# Altium PCB 2009_DFMUX_MEZZANINE_REV4_TIMEMAIL.PCBDOC (part 4 of 6)
Units mil, origin at the board's own origin, x right, y up, seen from the top; angles counter-clockwise.
Board outline 4922.86 x 3627.76 mil, 6 copper layers (Top Layer, Internal Plane 1, Mid-Layer 1, Internal Plane 2, Mid-Layer 2, Bottom Layer); 519 components, 606 nets, 2175 pads, 757 vias.
Unrouted connection lines stored in the file: 148.
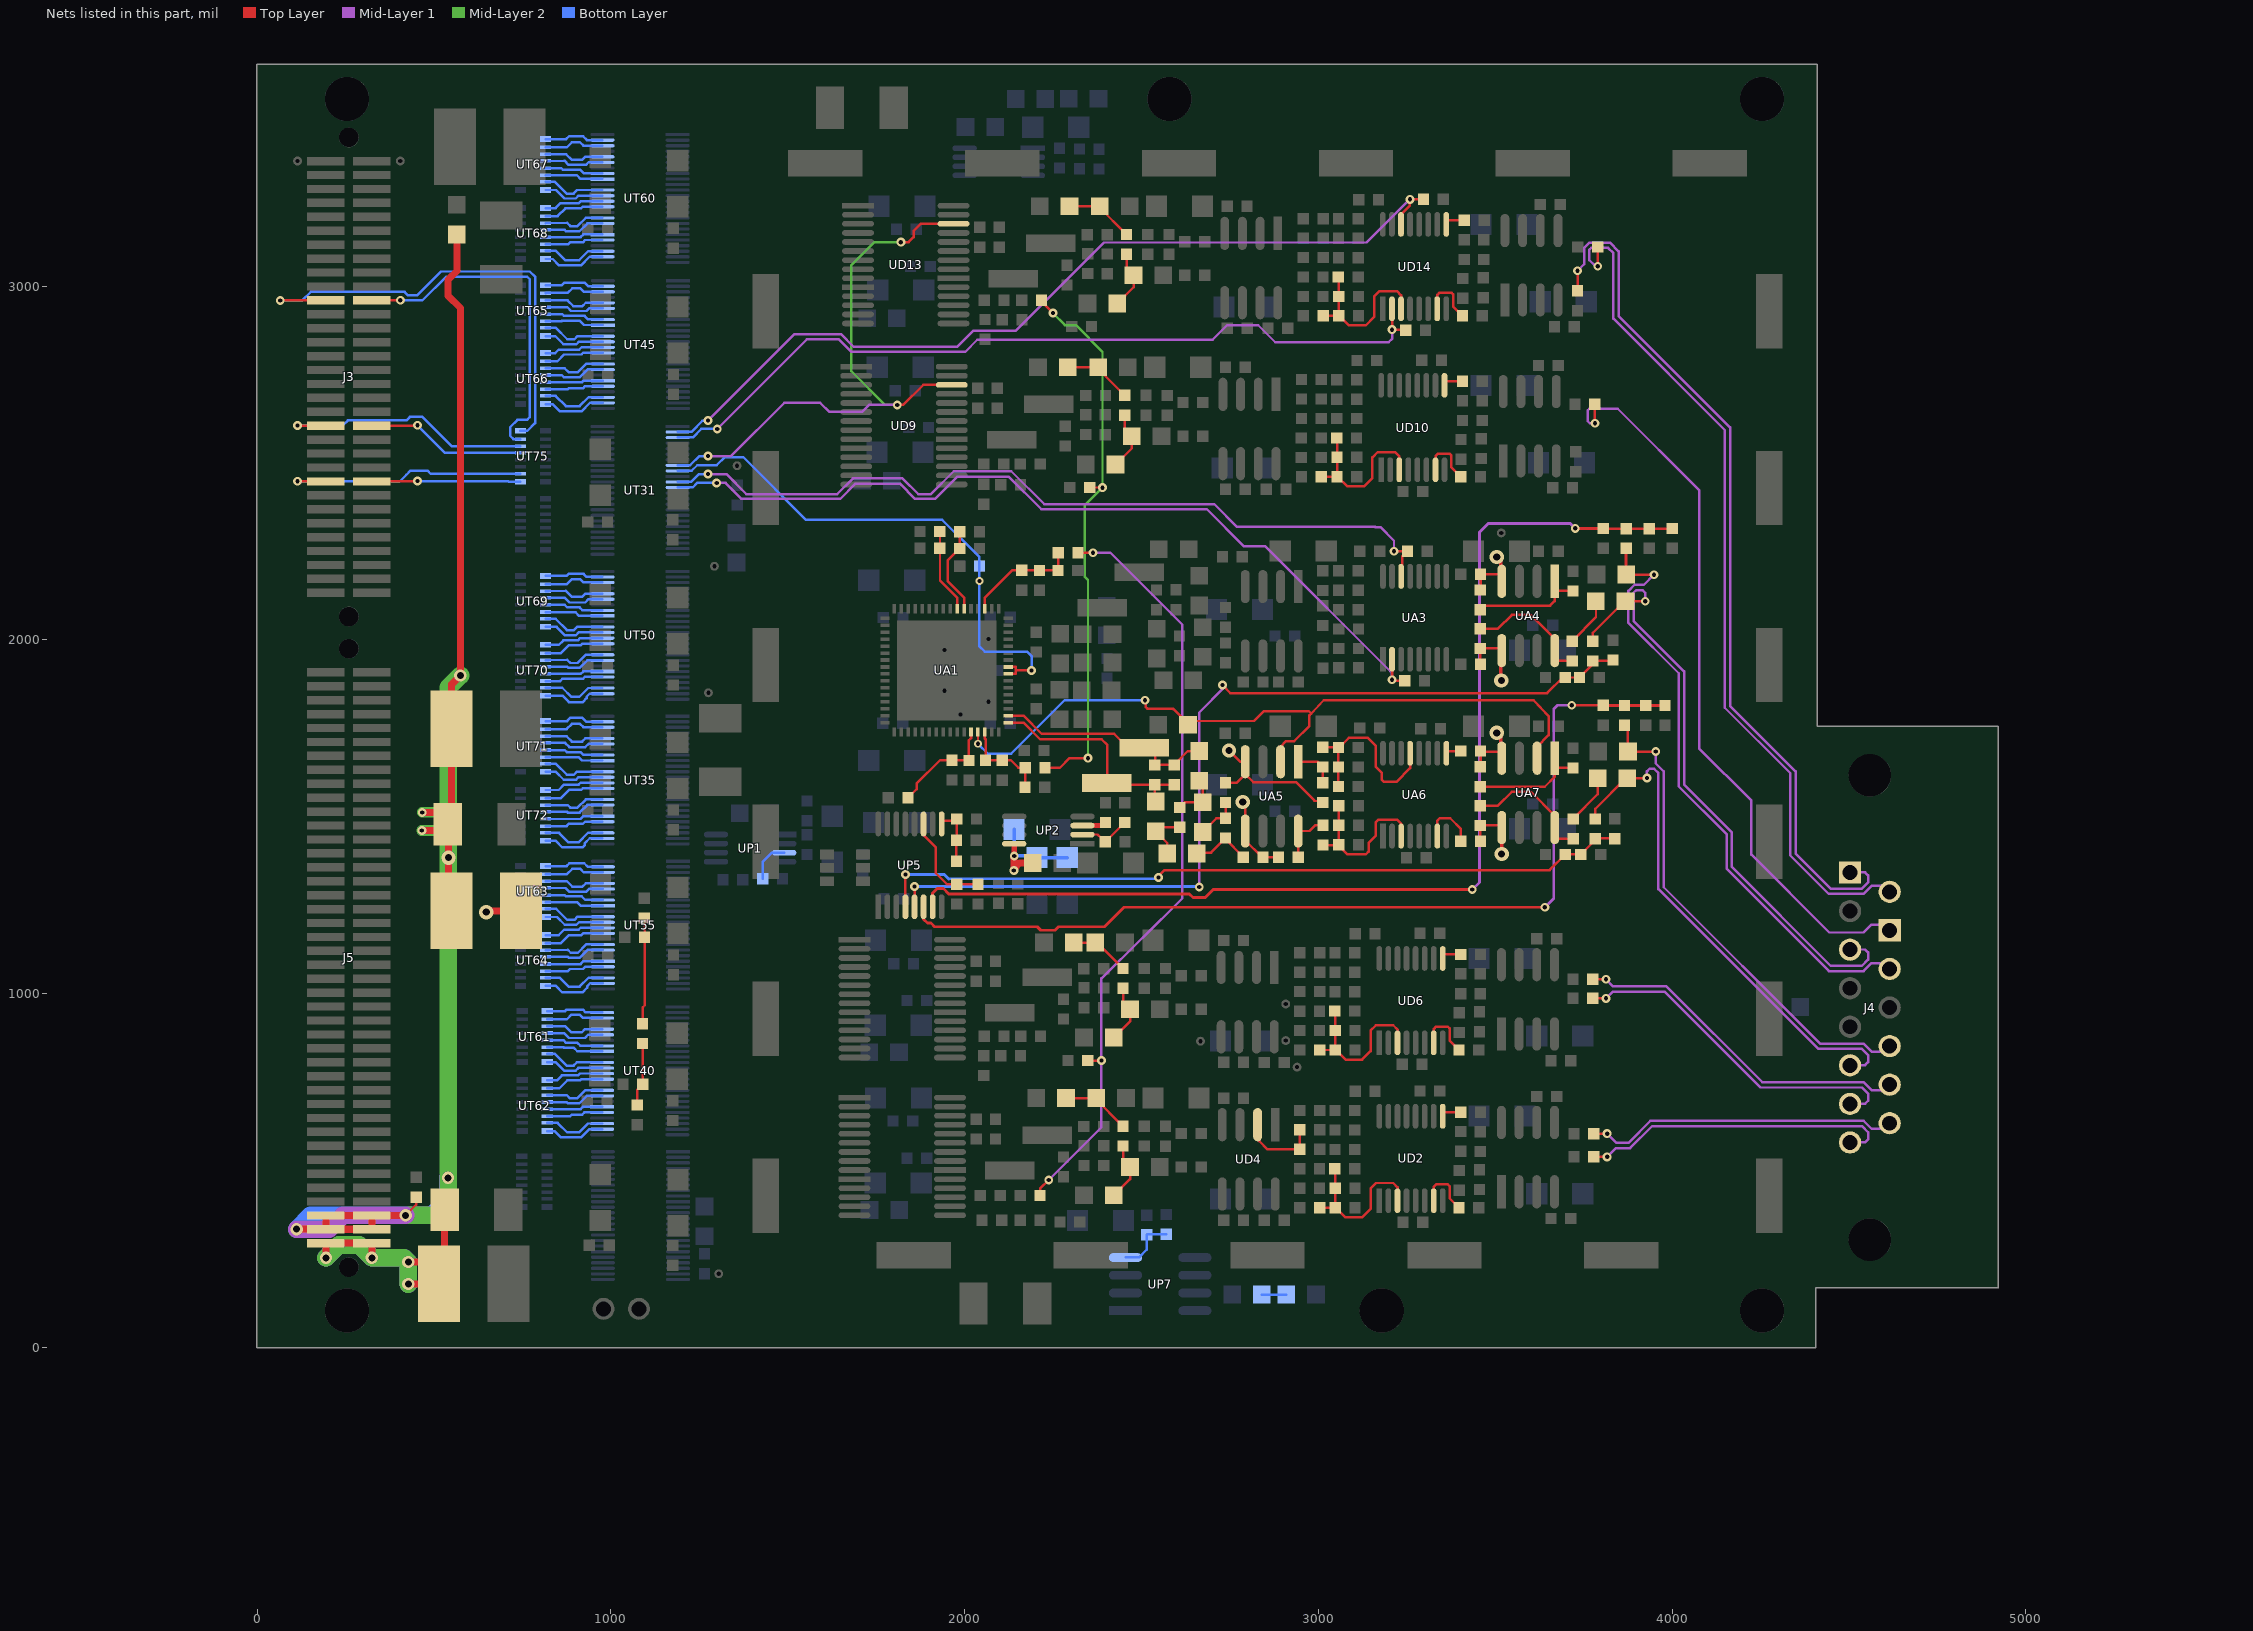
[diagram p8: the nets of this part, all layers, seen from the top]

## Via types
v1: diameter 25, hole 12, Top Layer to Bottom Layer, 692 vias
v2: diameter 40, hole 20, Top Layer to Bottom Layer, 39 vias
v3: diameter 35, hole 20, Top Layer to Bottom Layer, 23 vias
v4: diameter 22, hole 12, Top Layer to Bottom Layer, 3 vias

## Nets (pads, with @x,y where several pads share a name; then routed paths per layer and width w, separated by ;. In a path a pad name is that pad's centre, name@x,y a point inside that pad or via, vN(x,y) a via of type N, cw(c..) or ccw(c..) an arc to the next point about the centre after c; other vN are vias at no path point) (continued)
N197030_6344: RD4.1 RD12.1 UD4.2 | length 228.3
  Top Layer w7: UD4.2@2827.63,629.43 2832.63,624.43 2832.63,583 2856.2,559.43 2947.63,559.43 RD4.1@2947.63,614.43
N197797: RA5.2 RA6.2 UA1.23 | length 238.1
  Top Layer w7: RA6.2@1930.27,2305.87 1930.27,2258.37 1930.27,2167.37 1978.66,2118.97 UA1.23@1978.66,2087.85
N197910: CA2.1 RA7.2 RA8.2 RA9.1 UA1.19 | length 319.9
  Top Layer w7: UA1.19@2057.4,2087.85 2057.4,2119 2134.27,2195.87 2161.77,2195.87 2211.77,2195.87 2264.27,2195.87 RA7.2@2264.27,2245.87
N197956: RA3.2 RA4.2 UA1.22 | length 251.4
  Top Layer w7: RA4.2@1985.77,2305.87 1985.77,2258.37 1951.77,2224.37 1951.77,2165.87 1998.35,2119.29 UA1.22@1998.35,2087.85
N198124: CA31.1 RA43.2 RA44.1 RA49.2 UA1.62 | length 256
  Top Layer w7: UA1.62@2057.4,1739.43 2057.4,1720.23 2059.27,1718.37 2059.27,1659.37 2106.77,1659.37 2130.77,1659.37 2151.77,1638.37 2170.77,1638.37 RA44.1@2170.77,1583.37
N198251: CA33.2 RA54.1 RA56.2 UA1.60 | length 307.4
  Top Layer w7: RA56.2@1840.27,1553.37 1864.27,1577.37 1864.27,1593.37 1930.27,1659.37 1964.27,1659.37 2011.77,1659.37 2011.77,1715.87 2018.03,1722.13 UA1.60@2018.03,1739.43
N199059: CP4.1 UP1.3 | length 119.3
  Bottom Layer w7: CP4.1@1429.63,1324 1429.63,1373 1454.43,1397.8 UP1.3@1489.63,1397.8
N199942: CP18.1 RP25.1 RP27.1 RP29.2 UP5.5 | length 2623.4
  Top Layer w7: UP5.5@1858.33,1245.8 v1(1858.33,1302.33) ; v1(2728.63,1872) 2751.27,1849 3646.63,1849 3690.63,1893.37 3697.63,1893.37 3737.63,1893.37 3775.63,1931.37 3775.63,1940.37 3829.63,1940.37 CP18.1@3832.63,1943.37
  Mid-Layer 1 w7: v1(2663,1301) 2663,1794 2735,1866 v1(2728.63,1872)
  Bottom Layer w8: v1(1858.33,1302.33) 2661.67,1302.33 v1(2663,1301)
N199948: CP20.1 RP32.1 RP33.2 RP34.2 UP5.4 | length 2158.2
  Top Layer w7: UP5.4@1832.73,1245.8 v1(1832.73,1336.73) ; v1(2548,1328) 2544,1328 2565,1349 3653.27,1349 3697.63,1393.37 3741.63,1393.37 3782.63,1434.37 3782.63,1437.37 3783.63,1438.37 CP20.1@3837.63,1438.37
  Bottom Layer w7: 1955,1324 v1@2544,1324
  Bottom Layer w8: v1(1832.73,1336.73) 1942.27,1336.73 1955,1324 ; v1@2544,1324 v1(2548,1328)
N200349: CA35.2 UA1.61 UA5.2 UA7.2 | length 2139.8
  Top Layer w7: v4(2037.72,1705.87) UA1.61@2037.72,1739.43 ; v1(2510,1829) 2511.63,1829 2511.63,1810.37 2516.57,1805.43 2590,1805.43 2590,1804 2632.6,1761.4 2631.63,1760.43 2641.63,1770.43 2817.63,1770.43 2845.63,1798.43 2972.63,1798.43 2979.63,1791.43 ; UA5.2@2892.63,1655.43 2892.63,1697.43 2908.63,1713.43 2931.63,1713.43 2974.63,1756.43 2974.63,1786.43 2979.63,1791.43 ; UA7.2@3617.63,1665.43 3617.63,1697.43 3650.63,1730.43 3650.63,1784.43 3608.37,1829 3015,1829 2979.63,1791.43
  Mid-Layer 1 w7: v1(2510,1829) 2511.63,1829 v1@2511.63,1825.37
  Bottom Layer w7: v4(2037.72,1705.87) 2065.22,1678.37 2131.77,1678.37 2282.4,1829 v1(2510,1829)
N200703: CA29.2 JA2.2 LA7.1 RA41.1 UA1.1 | length 654.5
  Top Layer w7: UA1.1@2123.35,1766 2166.07,1766 2213.63,1718.43 2387.63,1718.43 2402.63,1703.43 2402.63,1595.43 2407.63,1590.43 RA41.1@2537.63,1590.43 ; LA7.1@2539.63,1542.43 2537.63,1544.43 RA41.1@2537.63,1590.43 ; CA29.2@2592.63,1589.43 2591.63,1590.43 RA41.1@2537.63,1590.43
N205033: CD13.2 LD3.2 LD4.1 | length 166.3
  Top Layer w7: LD3.2@2421.63,429.43 2467.63,475.43 2467.63,509.43 2447.63,529.43 CD13.2@2447.63,568.43
N205033_3007: CD73.2 LD15.2 LD16.1 | length 166.3
  Top Layer w7: LD15.2@2431.63,2950.43 2477.63,2996.43 2477.63,3030.43 2457.63,3050.43 CD73.2@2457.63,3089.43
N205033_5405: CD53.2 LD11.2 LD12.1 | length 166.3
  Top Layer w7: LD11.2@2426.63,2495.43 2472.63,2541.43 2472.63,2575.43 2452.63,2595.43 CD53.2@2452.63,2634.43
N205033_5853: CD33.2 LD7.2 LD8.1 | length 166.3
  Top Layer w7: LD7.2@2421.63,875.43 2467.63,921.43 2467.63,955.43 2447.63,975.43 CD33.2@2447.63,1014.43
N205049: CD13.1 LD1.2 LD2.1 | length 199.1
  Top Layer w7: LD1.2@2286.63,704.43 LD2.1@2367.63,704.43 ; LD2.1@2372.63,704.43 LD2.1@2367.63,704.43 ; CD13.1@2447.63,624.43 LD2.1@2367.63,704.43
N205049_2984: CD73.1 LD13.2 LD14.1 | length 199.1
  Top Layer w7: LD13.2@2296.63,3225.43 LD14.1@2377.63,3225.43 ; LD14.1@2382.63,3225.43 LD14.1@2377.63,3225.43 ; CD73.1@2457.63,3145.43 LD14.1@2377.63,3225.43
N205049_5379: CD53.1 LD9.2 LD10.1 | length 199.1
  Top Layer w7: LD9.2@2291.63,2770.43 LD10.1@2372.63,2770.43 ; LD10.1@2377.63,2770.43 LD10.1@2372.63,2770.43 ; CD53.1@2452.63,2690.43 LD10.1@2372.63,2770.43
N205049_5827: CD33.1 LD5.2 LD6.1 | length 169.8
  Top Layer w7: LD5.2@2308.63,1144 2369.63,1144 2374.63,1144 2447.63,1071 CD33.1@2447.63,1070.43
N205083: RD21.1 RD22.2 RD23.1 RD24.1 UD2.3 | length 458.8
  Top Layer w7: RD22.2@3003.63,394.43 RD23.1@3047.63,394.43 ; RD24.1@3046.63,504.43 3047.63,503.43 3047.63,449.43 RD23.1@3047.63,394.43 ; UD2.3@3223.83,414.43 3223.83,452.23 3211.63,464.43 3162.63,464.43 3147.63,449.43 3147.63,391.43 3123.63,367.43 3076.63,367.43 3049.63,394.43 RD23.1@3047.63,394.43
N205083_3003: RD111.1 RD112.2 RD113.1 RD114.1 UD14.3 | length 458.8
  Top Layer w7: RD112.2@3013.63,2915.43 RD113.1@3057.63,2915.43 ; RD114.1@3056.63,3025.43 3057.63,3024.43 3057.63,2970.43 RD113.1@3057.63,2915.43 ; UD14.3@3233.83,2935.43 3233.83,2973.23 3221.63,2985.43 3172.63,2985.43 3157.63,2970.43 3157.63,2912.43 3133.63,2888.43 3086.63,2888.43 3059.63,2915.43 RD113.1@3057.63,2915.43
N205083_5399: RD81.1 RD82.2 RD83.1 RD84.1 UD10.3 | length 458.8
  Top Layer w7: RD82.2@3008.63,2460.43 RD83.1@3052.63,2460.43 ; RD84.1@3051.63,2570.43 3052.63,2569.43 3052.63,2515.43 RD83.1@3052.63,2460.43 ; UD10.3@3228.83,2480.43 3228.83,2518.23 3216.63,2530.43 3167.63,2530.43 3152.63,2515.43 3152.63,2457.43 3128.63,2433.43 3081.63,2433.43 3054.63,2460.43 RD83.1@3052.63,2460.43
N205083_5847: RD51.1 RD52.2 RD53.1 RD54.1 UD6.3 | length 458.8
  Top Layer w7: RD52.2@3003.63,840.43 RD53.1@3047.63,840.43 ; RD54.1@3046.63,950.43 3047.63,949.43 3047.63,895.43 RD53.1@3047.63,840.43 ; UD6.3@3223.83,860.43 3223.83,898.23 3211.63,910.43 3162.63,910.43 3147.63,895.43 3147.63,837.43 3123.63,813.43 3076.63,813.43 3049.63,840.43 RD53.1@3047.63,840.43
N205093: RD3.1 UD2.9 | length 63.9
  Top Layer w7: UD2.9@3351.72,653.02 3351.72,654.43 3351.63,654.43 3351.63,665.43 3352.63,664.43 RD3.1@3402.63,664.43
N205093_2991: RD93.1 UD14.9 | length 63.9
  Top Layer w7: UD14.9@3361.72,3174.02 3361.72,3175.43 3361.63,3175.43 3361.63,3186.43 3362.63,3185.43 RD93.1@3412.63,3185.43
N205093_5387: RD63.1 UD10.9 | length 63.9
  Top Layer w7: UD10.9@3356.72,2719.02 3356.72,2720.43 3356.63,2720.43 3356.63,2731.43 3357.63,2730.43 RD63.1@3407.63,2730.43
N205093_5835: RD33.1 UD6.9 | length 63.9
  Top Layer w7: UD6.9@3351.72,1099.02 3351.72,1100.43 3351.63,1100.43 3351.63,1111.43 3352.63,1110.43 RD33.1@3402.63,1110.43
N205095: RD27.1 UD2.7 | length 160.9
  Top Layer w7: UD2.7@3326.23,414.43 3326.23,454.03 3332.63,460.43 3365.63,460.43 3370.63,455.43 3370.63,421.43 RD27.1@3397.63,394.43
N205095_2994: RD117.1 UD14.7 | length 160.9
  Top Layer w7: UD14.7@3336.23,2935.43 3336.23,2975.03 3342.63,2981.43 3375.63,2981.43 3380.63,2976.43 3380.63,2942.43 RD117.1@3407.63,2915.43
N205095_5389: RD87.1 UD10.7 | length 160.9
  Top Layer w7: UD10.7@3331.23,2480.43 3331.23,2520.03 3337.63,2526.43 3370.63,2526.43 3375.63,2521.43 3375.63,2487.43 RD87.1@3402.63,2460.43
N205095_5837: RD57.1 UD6.7 | length 160.9
  Top Layer w7: UD6.7@3326.23,860.43 3326.23,900.03 3332.63,906.43 3365.63,906.43 3370.63,901.43 3370.63,867.43 RD57.1@3397.63,840.43
N238970: RA17.2 RA18.1 UA4.4 | length 235.6
  Top Layer w7: RA18.1@3457.63,2140.43 3458.63,2141.43 3458.63,2185.43 3512.63,2185.43 3515,2183.07 3517.63,2180.43 UA4.4@3517.63,2165.43
  Top Layer w10: v2(3504,2234) v2@3515,2223 ; UA4.4@3517.63,2165.43 3515,2168.07 UA4.4@3515,2183.07 ; UA4.4@3515,2183.07 v2@3515,2223 ; UA4.4@3515,2183.07 v2@3515,2223
N238974: RA13.1 RA18.2 UA4.1 | length 328.4
  Top Layer w7: RA18.2@3457.63,2084.43 3469.63,2096.43 3654.63,2096.43 3667.63,2109.43 UA4.1@3667.63,2138 ; UA4.1@3667.63,2165.43 UA4.1@3667.63,2138 ; RA13.1@3719.63,2138 UA4.1@3667.63,2138
N238978: RA28.2 RA29.1 UA4.8 | length 365.2
  Top Layer w7: RA28.2@3457.63,2031.43 3507.63,2031.43 3546.63,2070.43 3600.63,2070.43 3667.63,2003.43 3667.63,1969.43 3667.63,1943.37 3670.57,1940.43 RA29.1@3717.63,1940.43
N238986: RA27.2 RA28.1 UA4.5 | length 193.5
  Top Layer w7: RA27.2@3458.63,1930.43 3457.63,1931.43 3457.63,1975.43 3511.63,1975.43 UA4.5@3517.63,1969.43
  Top Layer w10: v2(3517,1885) 3516,1886 3516,1968 3517.43,1969.43 UA4.5@3517.63,1969.43
N244377: RP28.2 RP31.2 UP5.11 | length 286.1
  Top Layer w7: UP5.11@1883.88,1480.05 1883.88,1448.12 1918.63,1413.37 1918.63,1340 1949.27,1309.37 1977.63,1309.37 RP28.2@2037.63,1309.37
N245845: CA47.1 RA29.2 | length 140.3
  Top Layer w7: RA29.2@3717.63,1996.43 3717.63,1997 3784.63,2064 CA47.1@3784.63,2109
N247609: RP21.2 RP22.2 RP23.1 UP5.9 | length 170.6
  Top Layer w7: UP5.9@1935.07,1480.05 1935.07,1484.62 1939.85,1489 1973.63,1489 1977.63,1493 1977.63,1493.37 1977.63,1434.37 1976.63,1433.37 RP21.2@1976.63,1374
N247828: RA45.1 RA47.2 RA48.1 RA50.1 UA6.3 | length 460.9
  Top Layer w7: RA47.2@3012.63,1419.43 3056.63,1419.43 RA50.1@3057.63,1420.43 ; RA48.1@3057.63,1530.43 3057.63,1475.43 RA50.1@3057.63,1420.43 ; UA6.3@3233.83,1445.43 3233.83,1480.23 3222.63,1491.43 3169.63,1491.43 3161.63,1483.43 3161.63,1445.43 3141.63,1425.43 3141.63,1401.43 3133.63,1393.43 3081.63,1393.43 3057.63,1417.43 RA50.1@3057.63,1420.43
N247840: RA34.1 UA6.9 | length 43.2
  Top Layer w7: UA6.9@3361.77,1679.68 3367.52,1685.43 RA34.1@3402.63,1685.43
N247844: RA51.1 UA6.7 | length 160.1
  Top Layer w7: UA6.7@3336.23,1445.43 3336.23,1489.03 3342.63,1495.43 3372.63,1495.43 3402.63,1465.43 RA51.1@3402.63,1430.43
N247852: RA33.2 RA37.2 RA38.2 RA39.2 UA6.13 | length 524.2
  Top Layer w7: RA33.2@3012.63,1696.43 3055.63,1696.43 3056.63,1695.43 RA37.2@3057.63,1694.43 ; RA39.2@3056.63,1585.43 3056.63,1640.43 3056.63,1693.43 RA37.2@3057.63,1694.43 ; UA6.13@3259.4,1679.68 3259.4,1637.2 3220.63,1598.43 3185.63,1598.43 3178.63,1605.43 3178.63,1624.43 3162.63,1640.43 3162.63,1699.43 3139.63,1722.43 3085.63,1722.43 RA37.2@3057.63,1694.43
N247880: RA32.1 RA40.2 UA5.4 | length 410.8
  Top Layer w7: RA40.2@2737.63,1596.43 2769.63,1596.43 2792.63,1619.43 UA5.4@2792.63,1620.43 ; v2(2747,1687) 2778.57,1655.43 2792.63,1655.43 UA5.4@2792.63,1620.43 ; RA32.1@3012.63,1540.43 2988.63,1545.43 2936.63,1597.43 2815.63,1597.43 UA5.4@2792.63,1620.43
N247884: RA32.2 RA33.1 UA5.1 | length 120.2
  Top Layer w7: UA5.1@2942.63,1655.43 2997.63,1655.43 3012.63,1640.43 RA32.2@3012.63,1596.43
N247888: RA46.2 RA47.1 UA5.8 | length 151
  Top Layer w7: RA46.2@2943.63,1385.43 2942.63,1386.43 2942.63,1459.43 2974.63,1459.43 2990.63,1475.43 RA47.1@3012.63,1475.43
N247896: RA42.2 RA46.1 UA5.5 | length 225.2
  Top Layer w7: v2(2786,1541) 2792.63,1534.37 2792.63,1459.43 2792.63,1433.43 2840.63,1385.43 2843.63,1385.43 RA46.1@2887.63,1385.43
N247928: CA29.1 JA2.1 LA5.1 RA41.2 UA1.2 | length 635.3
  Top Layer w7: UA1.2@2123.35,1785.7 2166.37,1785.7 2217.63,1734.43 2422.63,1734.43 2461.63,1695.43 2507.63,1695.43 2521.63,1695.43 2538.63,1678.43 2538.63,1647.43 2537.63,1646.43 2591.63,1646.43 2592.63,1645.43 2592.63,1647.43 2630.63,1685.43 LA5.1@2662.63,1685.43
N247964: RA34.2 RA35.1 UA7.4 | length 196.3
  Top Layer w7: RA35.1@3457.63,1640.43 3458.63,1641.43 3458.63,1685.43 3460.07,1684 3510,1684 3515,1679 3517.63,1676.37 UA7.4@3517.63,1665.43
  Top Layer w10: v2(3504,1737) 3515,1726 3515,1679 3515,1668.07 UA7.4@3517.63,1665.43
N247968: RA35.2 RA36.1 UA7.1 | length 327.8
  Top Layer w7: RA35.2@3457.63,1584.43 3639.63,1584.43 3667.63,1612.43 3667.63,1635 UA7.1@3670.63,1638 ; UA7.1@3667.63,1665.43 3667.63,1638 UA7.1@3670.63,1638 ; RA36.1@3719.63,1638 UA7.1@3670.63,1638
N247972: RA52.2 RA53.1 UA7.8 | length 365.9
  Top Layer w7: RA52.2@3457.63,1531.43 3507.63,1531.43 3546.63,1570.43 3600.63,1570.43 3667.63,1503.43 3667.63,1469.43 3667.63,1449.37 3679.57,1437.43 RA53.1@3720.63,1437.43
N247980: RA51.2 RA52.1 UA7.5 | length 183.5
  Top Layer w7: RA51.2@3458.63,1430.43 3457.63,1431.43 3457.63,1475.43 3511.63,1475.43 UA7.5@3517.63,1469.43
  Top Layer w10: UA7.5@3517.63,1469.43 3518,1469.07 v2(3518,1394)
N248164: CA30.1 LA6.2 RA40.1 | length 126.2
  Top Layer w7: LA6.2@2672.63,1456.43 2711.63,1495.43 2737.63,1495.43 RA40.1@2737.63,1540.43
N248168: CA30.2 LA8.2 RA42.1 | length 173.9
  Top Layer w7: LA8.2@2656.63,1395.43 2659.63,1398.43 2696.63,1398.43 2737.63,1439.43 2737.63,1436.43 2787.63,1386.43 RA42.1@2787.63,1385.43
N248172: CA28.1 LA5.2 LA6.1 | length 136.4
  Top Layer w7: CA28.1@2607.63,1525.43 2622.63,1540.43 2672.63,1540.43 2672.63,1591.43 LA5.2@2662.63,1601.43
N248196: CA28.2 LA7.2 LA8.1 | length 149.2
  Top Layer w7: LA8.1@2572.63,1395.43 2572.63,1425.43 2539.63,1458.43 2550.63,1469.43 CA28.2@2607.63,1469.43
N248744: CA49.1 RA53.2 | length 144.1
  Top Layer w7: RA53.2@3720.63,1493.43 3720.63,1495 3789.63,1564 CA49.1@3789.63,1609
N536527: CA47.2 J4.3 RP27.2 | length 1743.7
  Top Layer w7: RP27.2@3775.63,1996.37 3775.63,2020 3864.63,2109 3868.63,2109 v1(3923.63,2109)
  Mid-Layer 1 w7: v1(3923.63,2109) 3923.63,2132.93 3916.13,2140.43 3898.63,2140.43 3891.13,2132.93 3891.13,2052.93 4033.63,1910.43 4033.63,1590.43 4168.63,1455.43 4168.63,1357.93 4448,1078.57 4536.13,1078.57 4553.63,1096.07 4553.63,1116.07 4545.2,1124.5 J4.3@4502.5,1124.5
N536537: CA46.1 J4.11 RP56.2 | length 1741.4
  Top Layer w7: CA46.1@3869.63,2184 v1(3948.63,2184)
  Top Layer w8: CA46.1@3869.63,2184 3869.63,2257.63 RP56.2@3870,2258
  Mid-Layer 1 w7: v1(3948.63,2184) 3920.07,2155.43 3893.63,2155.43 3876.13,2137.93 3876.13,2047.93 4018.63,1905.43 4018.63,1585.43 4153.63,1450.43 4153.63,1352.93 4443,1063.57 4541.13,1063.57 4563.63,1086.07 4598.43,1086.07 J4.11@4614.5,1070
N536553: CA48.1 J4.13 RP59.2 | length 1387.3
  Top Layer w7: RP59.2@3865,1758 3874.63,1748.37 3874.63,1684 v1(3953.63,1684)
  Mid-Layer 1 w7: v1(3953.63,1684) 3953.63,1650.43 3976.13,1627.93 3976.13,1300.43 4418.13,858.43 4541.13,858.43 4563.63,835.93 4598.43,835.93 J4.13@4614.5,852
N536575: CA49.2 J4.6 RP33.1 | length 1455.6
  Top Layer w7: RP33.1@3782.57,1493.43 3782.63,1493.37 3782.63,1522 CA49.2@3869.63,1609 ; CA49.2@3873.63,1609 v1(3928.63,1609)
  Mid-Layer 1 w7: v1(3928.63,1609) 3928.63,1627.93 3936.13,1635.43 3948.63,1635.43 3961.13,1622.93 3961.13,1295.43 4413.13,843.43 4536.13,843.43 4553.63,825.93 4553.63,805.93 4545.2,797.5 J4.6@4502.5,797.5
N536618: J4.14 RD43.2 | length 975.4
  Top Layer w7: RD43.2@3775.63,1040.37 v1(3813.13,1040.37)
  Mid-Layer 1 w7: v1(3813.13,1040.37) 3833.07,1020.43 3983.63,1020.43 4254.63,749.43 4541.13,749.43 4563.63,726.93 4598.43,726.93 J4.14@4614.5,743
N536666: J4.7 RD48.2 | length 980
  Top Layer w7: RD48.2@3775.63,986.37 v1(3813.13,986.37)
  Mid-Layer 1 w7: v1(3813.13,986.37) 3832.2,1005.43 3978.63,1005.43 4249.63,734.43 4536.13,734.43 4553.63,716.93 4553.63,696.93 4545.2,688.5 J4.7@4502.5,688.5
N538961: J4.15 RD13.2 | length 888.5
  Top Layer w7: RD13.2@3778.63,604 v1(3816.13,604)
  Mid-Layer 1 w7: v1(3816.13,604) 3842.2,577.93 3876.13,577.93 3938.63,640.43 4541.13,640.43 4563.63,617.93 4598.43,617.93 J4.15@4614.5,634
N539025: J4.8 RD18.2 | length 892.9
  Top Layer w7: RD18.2@3778.63,538.37 v1(3816.13,538.37)
  Mid-Layer 1 w7: v1(3816.13,538.37) 3840.7,562.93 3881.13,562.93 3943.63,625.43 4536.13,625.43 4553.63,607.93 4553.63,587.93 4545.2,579.5 J4.8@4502.5,579.5
N539569: J4.10 RD73.2 | length 2108.5
  Top Layer w7: v1(3781.63,2612) RD73.2@3781.63,2666
  Mid-Layer 1 w7: v1(3781.63,2612) 3767.07,2612 3761.13,2617.93 3761.13,2647.93 3766.13,2652.93 3846.13,2652.93 4076.13,2422.93 4076.13,1692.93 4223.63,1545.43 4223.63,1392.93 4444,1172.57 4541.13,1172.57 4563.63,1195.07 4598.43,1195.07 J4.10@4614.5,1179
N539716: J4.1 RD108.2 | length 2480.7
  Top Layer w7: RD108.2@3732.63,2986.43 v1(3732.63,3042.93)
  Mid-Layer 1 w7: v1(3732.63,3042.93) 3751.13,3061.43 3751.13,3107.93 3766.13,3122.93 3823.63,3122.93 3848.63,3097.93 3848.63,2915.43 4163.63,2600.43 4163.63,1812.93 4348.63,1627.93 4348.63,1395.43 4447.5,1296.57 4536.13,1296.57 4553.63,1314.07 4553.63,1334.07 4545.2,1342.5 J4.1@4502.5,1342.5
N539798: J4.9 RD103.2 | length 2441.8
  Top Layer w7: v1(3789.63,3056) RD103.2@3789.63,3110
  Mid-Layer 1 w7: v1(3789.63,3056) 3783.07,3056 3766.13,3072.93 3766.13,3102.93 3771.13,3107.93 3818.63,3107.93 3833.63,3092.93 3833.63,2907.93 4148.63,2592.93 4148.63,1807.93 4333.63,1622.93 4333.63,1390.43 4442.5,1281.57 4541.13,1281.57 4563.63,1304.07 4598.43,1304.07 J4.9@4614.5,1288
N562193: RA30.2 UA3.2 UT31.12 | length 2470.3
  Top Layer w7: UA3.2@3208.23,1945.43 3206.63,1943.83 3206.63,1934.43 3208.63,1932.43 3208.63,1894 3199.63,1885 3207.63,1885 v1(3207.63,1887) 3210.63,1884 RA30.2@3243.63,1884
  Mid-Layer 1 w7: v1(1299,2443.37) 1324.27,2443.37 1369.63,2398 1648.36,2398 1691.77,2441.41 1816.77,2441.41 1860.18,2398 1915.86,2398 1979.27,2461.41 2124.27,2461.41 2216.68,2369 2685,2369 2790,2264 2850,2264 3203,1911 3207.63,1911 v1(3207.63,1887)
  Bottom Layer w7: UT31.12@1188.63,2430.67 1231.5,2430.67 1243.8,2443.37 v1(1299,2443.37)
N562649: RA10.2 UA3.14 UT31.11 | length 2348
  Top Layer w7: v1(3213.63,2250.43) 3251.63,2250.43 3236.63,2235.43 3236.63,2182.5 UA3.14@3233.82,2179.68
  Mid-Layer 1 w7: v1(1274.27,2468.37) 1326.27,2468.37 1382.63,2412 1639.86,2412 1684.27,2456.41 1824.27,2456.41 1868.68,2412 1904.86,2412 1969.27,2476.41 2131.77,2476.41 2225.18,2383 2706,2383 2770,2319 3160,2319 3160.37,2318.63 3175,2318.63 3213.63,2280 v1(3213.63,2250.43)
  Bottom Layer w7: UT31.11@1188.63,2446.37 1227,2446.37 1249,2468.37 v1(1274.27,2468.37)
N563114: RA1.1 UA1.8 UA1.9 UT31.9 | length 1546
  Top Layer w7: UA1.8@2122.63,1903.9 UA1.8@2123.35,1903.9 ; UA1.9@2122.63,1923.6 UA1.9@2123.35,1923.6 ; UA1.8@2123.35,1903.8 2144.27,1903.8 2144.27,1923.48 UA1.9@2123.35,1923.48 ; 2144.27,1913.37 v1(2189.27,1913.37)
  Bottom Layer w7: UT31.9@1188.63,2477.77 1228.4,2477.77 1244,2493.37 1299,2493.37 1322.04,2516.41 1374.27,2516.41 1551.77,2338.91 1936.77,2338.91 2041.77,2233.91 2041.77,2208.37 v4(2041.77,2165.87) 2041.77,1981.41 2056.77,1966.41 2176.77,1966.41 2189.27,1953.91 v1(2189.27,1913.37)
N563431: UD9.26 UD13.26 UT31.8 | length 1708.6
  Top Layer w7: v1(1809.63,2664) 1826.27,2664 1882.9,2720.63 UD9.26@1964.03,2720.63 ; v1(1819.63,3124) 1841.63,3124 1855.63,3138 1855.63,3156 1875.27,3175.63 UD13.26@1969.03,3175.63
  Mid-Layer 1 w7: v1(1274.27,2519.37) 1340,2519.37 1490.63,2670 1591.63,2670 1617.63,2644 1709.63,2644 1729.63,2664 v1(1809.63,2664)
  Mid-Layer 2 w7: v1(1809.63,2664) 1774.63,2664 1679.63,2759 1679.63,3059 1744.63,3124 v1(1819.63,3124)
  Bottom Layer w7: UT31.8@1188.63,2493.47 1224.1,2493.47 1250,2519.37 v1(1274.27,2519.37)
N564745: RD119.2 UD14.2 UT31.3 | length 2328.2
  Top Layer w7: UD14.2@3208.23,2935.43 v1(3208.23,2876.6) 3246.47,2876.6 3246.63,2876.43 RD119.2@3246.63,2875.43
  Mid-Layer 1 w7: v1(1300.63,2596) 1553.63,2849 1644.63,2849 1679.63,2814 2001.63,2814 2035.63,2848 2701,2848 2742,2889 2830,2889 2878,2841 3198.63,2841 3208.23,2850.6 v1(3208.23,2876.6)
  Bottom Layer w7: UT31.3@1188.63,2571.97 1231.88,2571.97 1255.52,2596 v1(1300.63,2596)
N565087: RD91.2 UD14.14 UT31.2 | length 2496
  Top Layer w7: UD14.14@3233.8,3174.02 3231.63,3176.18 3231.63,3200.43 3258.63,3227.43 v1@3258.63,3245.43 ; v1(3258.63,3245) v1@3258.63,3245.43 ; RD91.2@3296.63,3245.43 v1@3258.63,3245.43
  Mid-Layer 1 w7: v1(1274.63,2620) 1518.63,2864 1650.63,2864 1686.63,2828 1978.63,2828 2023.63,2873 2144,2873 2394,3123 3135.63,3123 3257.63,3245 v1(3258.63,3245)
  Bottom Layer w7: UT31.2@1188.63,2587.67 1227.3,2587.67 1258.63,2619 1275.63,2619 v1(1274.63,2620)
N565612: J3.48 UT75.9 | length 420.9
  Top Layer w7: J3.48@324.55,2448 452.87,2448 v1(453.63,2448.77)
  Bottom Layer w7: v1(453.63,2448.77) 709.63,2448.77 712.03,2446.37 UT75.9@744.13,2446.37
N566158: J3.47 UT75.10 | length 807.7
  Top Layer w7: v1@113.63,2447 115,2448 194.63,2448 v1(114.33,2448)
  Bottom Layer w7: v1(114.33,2448) 403.55,2448 422.05,2466.37 ; 422.07,2466.37 433.93,2478.37 481.63,2478.37 490.63,2469.37 UT75.10@744.13,2469.37
N570816: CP9.1 CP23.1 CP24.1 LP2.2 RP11.1 UP2.8 | length 643.9
  Top Layer w7: v2(647.63,1230) v2@651,1233.37 ; UP2.8@2139.73,1424 2139.73,1388.1 2140.63,1389 v1(2140,1389)
  Top Layer w10: UP2.8@2139.73,1424 UP2.8@2140,1423.73
  Top Layer w15: v1@2140,1389 UP2.8@2140,1423.73
  Top Layer w20: v2@651,1233.37 LP2.2@746.3,1233.37 ; v1(2140,1389) 2140,1354 2155,1369 RP11.1@2192.63,1369
  Bottom Layer w7: CP9.1@2200,1389 CP9.1@2205,1384
  Bottom Layer w10: CP9.1@2200,1389 v1(2140,1389) ; CP9.1@2205,1384 CP24.1@2290,1384 ; v1(2140,1389) CP23.1@2140,1464 ; v1(2140,1389) CP23.1@2140,1464 ; v1(2140,1389) CP23.1@2140,1464
  other v1: 2139,1348
N570824: CP8.1 UP2.3 | length 68.6
  Top Layer w7: CP8.1@2388.83,1475.2 CP8.1@2397.63,1484
  Top Layer w15: UP2.3@2332.63,1475.2 CP8.1@2388.83,1475.2
N570828: RP9.2 RP10.1 UP2.2 | length 154.5
  Top Layer w7: UP2.2@2332.63,1449.6 2376.03,1449.6 2386.63,1439 2397.63,1439 RP10.1@2403.13,1433.5 ; RP10.1@2397.63,1429 2398.63,1429 RP10.1@2403.13,1433.5 ; RP9.2@2452.63,1483 RP10.1@2403.13,1433.5
N570972: J3.40 UT75.13 | length 452.2
  Top Layer w7: J3.40@324.55,2605.47 452.87,2605.47 v1(453.63,2606.23)
  Bottom Layer w7: v1(453.63,2606.23) 453.77,2606.23 531.63,2528.37 UT75.13@744.13,2528.37
N571170: J3.39 UT75.14 | length 754.5
  Top Layer w7: v1(114.33,2605.47) J3.39@194.63,2605.47
  Bottom Layer w7: v1(114.33,2605.47) 241.73,2605.47 256.63,2620.37 422.03,2620.37 431.63,2629.97 467.03,2629.97 549.63,2547.37 UT75.14@744.13,2547.37
N582215: J3.22 UT75.15 | length 989.9
  Top Layer w7: J3.22@324.55,2959.77 v1(404.85,2959.77)
  Bottom Layer w7: v1(404.85,2959.77) 467.4,2959.77 534,3026 763.63,3026 770.63,3019.37 770.63,2629.37 762.63,2621.37 735.63,2621.37 715.63,2601.37 715.63,2576.37 724.63,2567.37 UT75.15@744.13,2567.37
N582703: J3.21 UT75.16 | length 1363.4
  Top Layer w7: v1@64.23,2959.77 v1@66.32,2959.77 ; v1(65.55,2959) v1@66.32,2959.77 ; J3.21@194.63,2959.77 v1@66.32,2959.77
  Bottom Layer w7: v1(65.55,2959) 127.27,2959 151.7,2983.43 416.63,2983.43 425.63,2974.43 453.07,2974.43 520,3041 770.63,3041 785.63,3026.37 785.63,2612.37 763.63,2590.37 UT75.16@744.13,2590.37
N609644: CP1.2 RP1.2 RP2.1 | length 181
  Top Layer w7: RP1.2@1074.63,685 1074.63,728 1090.63,744 1090.63,858 RP2.1@1089.63,859
N609835: CP2.2 RP2.2 RP3.1 | length 301.9
  Top Layer w7: RP2.2@1089.63,915 1089.63,961 1095.63,967 1095.63,1159 1095.63,1213 RP3.1@1094.63,1214
N611462: RA7.1 RD20.2 RD60.2 | length 2197.6
  Top Layer w7: RD20.2@2213.13,429 2213.13,448.5 v1(2237.63,473) ; RA7.1@2320.27,2245.87 v1(2362.77,2245.87) ; RD60.2@2348.63,810.43 v1(2386.57,810.43)
  Mid-Layer 1 w7: v1(2237.63,473) 2386.57,621.93 v1(2386.57,810.43) 2386.57,1042.93 2615,1269 2615,2042.64 2411.77,2245.87 v1(2362.77,2245.87)
N612269: RA49.1 RD90.2 RD110.2 | length 1578.9
  Top Layer w7: RD110.2@2217.63,2960 2217.63,2956 v1(2249.63,2924) ; RA49.1@2226.77,1638.37 2269.27,1638.37 2296.27,1665.37 v1(2348.63,1665.37) ; RD90.2@2353.63,2430.43 2390.07,2430.43 v1(2389.63,2430)
  Mid-Layer 2 w7: v1(2249.63,2924) 2249.57,2923.93 2249.57,2923.07 2283.2,2889.43 2314.2,2889.43 2389.63,2814 v1(2389.63,2430) 2339.27,2379.64 2339.27,2178.37 2348.63,2169 v1(2348.63,1665.37)
N617296: CP5.1 J5.79 J5.80 J5.81 J5.82 LP1.1 LP2.1 RP4.2 RP13.2 | length 5781.1
  Top Layer w7: J5.80@324.55,373.07 324.62,373 v3@416.63,373 ; v3@416.7,373.07 v3@416.63,373 ; RP4.2@449.63,424 449.63,403 v3(419.63,373) v3@416.63,373 ; CP5.1@523.63,1444.73 539.63,1460.73 CP5.1@539.63,1478.37 ; CP5.1@523.63,1512 539.63,1496 CP5.1@539.63,1478.37 ; LP2.1@540.63,1242.37 LP2.1@549.63,1233.37 ; CP5.1@540.63,1477.37 CP5.1@539.63,1478.37 ; LP1.1@547.63,1796 549.63,1798 LP1.1@549.63,1748.37 ; CP5.1@549.63,1488 540,1478.37 CP5.1@539.63,1478.37 ; CP5.1@539.63,1478 CP5.1@539.63,1478.37 ; CP5.1@539.63,1478 522.63,1461 CP5.1@539.63,1478
  Top Layer w20: v3(111.63,334) 194.33,334 J5.81@194.63,333.7 ; v1(466.63,1512) CP5.1@523.63,1512 ; LP2.1@540.63,1242.37 v2(540.63,1384) CP5.1@540.63,1477.37 ; CP5.1@549.63,1488 549.63,1748.37 550,1748.73 550,1798.37 550,1874.37 ; RP13.2@564.63,3145 564.63,3042.13 540,3017.5 540,2972.5 574.63,2937.87 v3(574.63,1899) ; J5.81@194.63,333.7 J5.79@194.63,373.07 ; J5.81@194.63,333.7 324.55,333.7 J5.80@324.55,373.07 ; J5.81@194.63,333.7 J5.79@194.63,373.07 ; J5.79@194.63,373.07 J5.80@324.55,373.07 ; J5.80@324.55,373.07 416.7,373.07 J5.80@324.55,373.07 ; 550,1874.37 v3(574.63,1899) ; 550,1874.37 v3(574.63,1899) ; v1(465.63,1461) 522.63,1461 v1(465.63,1461)
  Mid-Layer 1 w50: v3(111.63,334) 204,334 243,373 v3(419.63,373)
  Mid-Layer 2 w30: v1(465.63,1461) 539.13,1461 ; v1(466.63,1512) 538.63,1512
  Mid-Layer 2 w50: v3(419.63,373) 508,373 540.63,405.63 v2(540.63,1384) 540.63,1865 v3(574.63,1899)
  Bottom Layer w50: v3(111.63,334) 150.63,373 v3(419.63,373) 493.63,373 539.63,419 v3(539.63,479)
N617312: CP17.2 J5.83 J5.84 LP4.1 | length 1427.3
  Top Layer w7: LP4.1@513.63,241 LP4.1@514.63,240 ; LP4.1@529.63,194 LP4.1@514.63,179 ; LP4.1@514.63,179 LP4.1@514.63,240 ; LP4.1@514.63,179 LP4.1@514.63,240
  Top Layer w20: v3(194.63,252.92) 194.63,294.33 J5.84@324.55,294.33 ; v3(427.63,179) LP4.1@514.63,179 ; v3(427.63,241) LP4.1@513.63,241 ; LP4.1@529.63,194 CP17.2@529.63,389 ; J5.84@324.55,294.33 v3(324.55,252.92) J5.84@324.55,294.33
  Mid-Layer 2 w50: v3(194.63,252.92) 230.72,289 288.47,289 v3(324.55,252.92) 415.72,252.92 v3(427.63,241) v3(427.63,179)
  Bottom Layer w50: v3(194.63,252.92) 231.72,290 287.47,290 v3(324.55,252.92) 415.72,252.92 v3(427.63,241) v3(427.63,179)
N714404: DP4.1 RP19.1 | length 70
  Bottom Layer w7: DP4.1@2839.63,149 RP19.1@2909.63,149
N717936: RP20.1 RP24.2 UP7.4 | length 166.5
  Bottom Layer w7: UP7.4@2454.63,254 2492.63,254 2514.63,276 2514.63,318 2515.63,319 RP24.2@2569.63,319
N794655: CP45.1 RP54.1 RP55.2 RP56.1 UP5.7 | length 3168.1
  Top Layer w8: UP5.7@1909.53,1245.8 1909.53,1283.53 1922.5,1296.5 1940,1296.5 1955,1281.5 2635,1281.5 2645,1271.5 2680,1271.5 2702.5,1294 v1(3435,1294) ; v1(3726,2315) 3805,2315 3806,2314 3870,2314 3935,2314 CP45.1@4000,2314
  Mid-Layer 1 w8: v1(3435,1294) 3455,1314 3455,2304 3480,2329 3712,2329 v1(3726,2315)
N795104: CP46.1 RP57.1 RP58.2 RP59.1 UP5.6 | length 2721.9
  Top Layer w8: UP5.6@1883.93,1245.8 1883.93,1210.07 1895,1199 1905,1199 1915,1189 2205,1189 2215,1179 2255,1179 2265,1189 2395,1189 2450,1244 v1(3640,1244) ; v1(3716,1815) 3805,1815 3806,1814 3865,1814 3925,1814 CP46.1@3980,1814
  Mid-Layer 1 w8: v1(3640,1244) 3665,1269 3665,1804 3676,1815 v1(3716,1815)
N839929: UT50.29 UT70.6 | length 165.9
  Bottom Layer w7: UT70.6@815.13,1883.37 856.63,1883.37 862.63,1889.37 920.83,1889.37 926.13,1895.07 UT50.29@976.03,1895.07
N839929_9383: UT60.29 UT68.6 | length 165.7
  Bottom Layer w7: UT68.6@815.13,3118.37 879.63,3118.37 884.63,3123.37 920.63,3123.37 927.33,3130.07 UT60.29@976.03,3130.07
N839929_10469: UT45.29 UT66.6 | length 165.5
  Bottom Layer w7: UT66.6@815.13,2708.37 878.63,2708.37 880.63,2710.37 920.63,2710.37 927.33,2717.07 UT45.29@977.03,2717.07
N839929_10665: UT55.29 UT64.6 | length 167.2
  Bottom Layer w7: UT64.6@815.13,1063.37 878.63,1063.37 884.63,1069.37 921.63,1069.37 928.33,1076.07 UT55.29@977.03,1076.07
N839929_10861: UT40.29 UT62.6 | length 159.3
  Bottom Layer w7: UT62.6@820.13,653.37 884.63,653.37 888.63,657.37 918.63,657.37 925.33,664.07 UT40.29@975.03,664.07
N839929_11253: UT35.29 UT72.6 | length 166.1
  Bottom Layer w7: UT72.6@815.13,1473.37 874.63,1473.37 880.63,1479.37 920.63,1479.37 927.63,1486.07 UT35.29@976.03,1486.07
N839997: UT50.27 UT70.7 | length 182.1
  Bottom Layer w7: UT70.7@815.13,1864.37 862.63,1864.37 888.63,1838.37 910.63,1838.37 935.93,1863.67 UT50.27@976.03,1863.67
N839997_9355: UT60.27 UT68.7 | length 182.1
  Bottom Layer w7: UT68.7@815.13,3099.37 844.63,3099.37 870.63,3073.37 910.63,3073.37 935.93,3098.67 UT60.27@976.03,3098.67
N839997_10465: UT45.27 UT66.7 | length 184.4
  Bottom Layer w7: UT66.7@815.13,2689.37 843.63,2689.37 872.63,2660.37 911.63,2660.37 936.93,2685.67 UT45.27@977.03,2685.67
N839997_10661: UT55.27 UT64.7 | length 182.7
  Bottom Layer w7: UT64.7@815.13,1044.37 855.63,1044.37 880.63,1019.37 911.63,1019.37 936.93,1044.67 UT55.27@977.03,1044.67
N839997_10857: UT40.27 UT62.7 | length 176.6
  Bottom Layer w7: UT62.7@820.13,634.37 849.63,634.37 876.63,607.37 909.63,607.37 934.93,632.67 UT40.27@975.03,632.67
N839997_11249: UT35.27 UT72.7 | length 183.4
  Bottom Layer w7: UT72.7@815.13,1454.37 853.63,1454.37 880.63,1427.37 908.63,1427.37 935.93,1454.67 UT35.27@976.03,1454.67
N840117: UT50.26 UT70.8 | length 180.6
  Bottom Layer w7: UT70.8@815.13,1841.37 864.27,1841.37 881.27,1824 920.63,1824 931.63,1835.37 931.63,1839.37 940.23,1847.97 UT50.26@976.03,1847.97
N840117_9365: UT60.26 UT68.8 | length 178.5
  Bottom Layer w7: UT68.8@815.13,3076.37 835.63,3076.37 853.63,3058.37 915.63,3058.37 940.23,3082.97 UT60.26@976.03,3082.97
N840117_10477: UT45.26 UT66.8 | length 180.8
  Bottom Layer w7: UT66.8@815.13,2666.37 834.63,2666.37 855.63,2645.37 916.63,2645.37 941.23,2669.97 UT45.26@977.03,2669.97
N840117_10673: UT55.26 UT64.8 | length 182.3
  Bottom Layer w7: UT64.8@815.13,1021.37 844.63,1021.37 862.63,1003.37 919.63,1003.37 932.63,1016.37 932.63,1020.37 941.23,1028.97 UT55.26@977.03,1028.97
N840117_10869: UT40.26 UT62.8 | length 172.1
  Bottom Layer w7: UT62.8@820.13,611.37 840.63,611.37 858.63,593.37 915.63,593.37 939.23,616.97 UT40.26@975.03,616.97
N840117_11261: UT35.26 UT72.8 | length 181.9
  Bottom Layer w7: UT72.8@815.13,1431.37 844.63,1431.37 862.63,1413.37 919.63,1413.37 926.63,1420.37 926.63,1425.37 940.23,1438.97 UT35.26@976.03,1438.97
N840583: UT50.47 UT69.1 | length 167
  Bottom Layer w7: UT69.1@815.13,2180.37 874.63,2180.37 880.63,2186.37 922.63,2186.37 931.33,2177.67 UT50.47@976.03,2177.67
N840583_9368: UT60.47 UT67.1 | length 168.6
  Bottom Layer w7: UT67.1@815.13,3415.37 873.63,3415.37 881.63,3423.37 921.63,3423.37 932.33,3412.67 UT60.47@976.03,3412.67
N840583_10462: UT45.47 UT65.1 | length 168.8
  Bottom Layer w7: UT65.1@815.13,3002.37 861.63,3002.37 868.63,3009.37 925.63,3009.37 935.33,2999.67 UT45.47@977.03,2999.67
N840583_10658: UT55.47 UT63.1 | length 169.2
  Bottom Layer w7: UT63.1@815.13,1360.37 874.63,1360.37 882.63,1368.37 924.63,1368.37 934.33,1358.67 UT55.47@977.03,1358.67
N840583_10854: UT40.47 UT61.1 | length 159.7
  Bottom Layer w7: UT61.1@820.13,950.37 870.63,950.37 874.63,954.37 920.63,954.37 928.33,946.67 UT40.47@975.03,946.67
N840583_11246: UT35.47 UT71.1 | length 168.8
  Bottom Layer w7: UT71.1@815.13,1770.37 876,1770.37 884.63,1779 919.63,1779 929.97,1768.67 UT35.47@976.03,1768.67
N840601: UT50.46 UT69.2 | length 170.6
  Bottom Layer w7: UT69.2@815.13,2157.37 875.63,2157.37 889.63,2171.37 912.63,2171.37 922.03,2161.97 UT50.46@976.03,2161.97
N840601_9374: UT60.46 UT67.2 | length 170.6
  Bottom Layer w7: UT67.2@815.13,3392.37 875.63,3392.37 889.63,3406.37 912.63,3406.37 922.03,3396.97 UT60.46@976.03,3396.97
N840601_10467: UT45.46 UT65.2 | length 171.5
  Bottom Layer w7: UT65.2@815.13,2979.37 816.63,2980.37 877.63,2980.37 890.63,2993.37 913.63,2993.37 923.03,2983.97 UT45.46@977.03,2983.97
N840601_10663: UT55.46 UT63.2 | length 172
  Bottom Layer w7: UT63.2@815.13,1337.37 875.63,1337.37 890.63,1352.37 913.63,1352.37 923.03,1342.97 UT55.46@977.03,1342.97
N840601_10859: UT40.46 UT61.2 | length 164.2
  Bottom Layer w7: UT61.2@820.13,927.37 875.63,927.37 888.63,940.37 911.63,940.37 921.03,930.97 UT40.46@975.03,930.97
N840601_11251: UT35.46 UT71.2 | length 171
  Bottom Layer w7: UT71.2@815.13,1747.37 874.63,1747.37 889.63,1762.37 912.63,1762.37 922.03,1752.97 UT35.46@976.03,1752.97
N840633: UT50.44 UT69.3 | length 171.8
  Bottom Layer w7: UT69.3@815.13,2137.37 824.13,2137.37 872.63,2138.37 889.63,2121.37 918.63,2121.37 927.83,2130.57 UT50.44@976.03,2130.57
N840633_9348: UT60.44 UT67.3 | length 171.3
  Bottom Layer w7: UT67.3@815.13,3372.37 873.63,3372.37 889.63,3356.37 918.63,3356.37 927.83,3365.57 UT60.44@976.03,3365.57
N840633_10466: UT45.44 UT65.3 | length 172.3
  Bottom Layer w7: UT65.3@815.13,2959.37 877.63,2959.37 893.63,2943.37 919.63,2943.37 928.83,2952.57 UT45.44@977.03,2952.57
N840633_10662: UT55.44 UT63.3 | length 171.9
  Bottom Layer w7: UT63.3@815.13,1317.37 875.63,1317.37 890.63,1302.37 919.63,1302.37 928.83,1311.57 UT55.44@977.03,1311.57
N840633_10858: UT40.44 UT61.3 | length 165.8
  Bottom Layer w7: UT61.3@820.13,907.37 871.63,907.37 888.63,890.37 917.63,890.37 926.83,899.57 UT40.44@975.03,899.57
N840633_11250: UT35.44 UT71.3 | length 170.9
  Bottom Layer w7: UT71.3@815.13,1727.37 874.63,1727.37 889.63,1712.37 918.63,1712.37 927.83,1721.57 UT35.44@976.03,1721.57
N840655: UT50.43 UT69.4 | length 170.6
  Bottom Layer w7: UT69.4@815.13,2118.37 824.13,2118.37 868.63,2119.37 882.63,2105.37 927.63,2105.37 937.13,2114.87 UT50.43@976.03,2114.87
N840655_9379: UT60.43 UT67.4 | length 170
  Bottom Layer w7: UT67.4@815.13,3353.37 814.62,3353.37 868.63,3354.37 880.63,3342.37 929.63,3342.37 937.13,3349.87 UT60.43@976.03,3349.87
N840655_10470: UT45.43 UT65.4 | length 169.6
  Bottom Layer w7: UT65.4@815.13,2940.37 876.63,2940.37 887.63,2929.37 930.63,2929.37 938.13,2936.87 UT45.43@977.03,2936.87
N840655_10666: UT55.43 UT63.4 | length 169.1
  Bottom Layer w7: UT63.4@815.13,1298.37 871.63,1298.37 881.63,1288.37 930.63,1288.37 938.13,1295.87 UT55.43@977.03,1295.87
N840655_10862: UT40.43 UT61.4 | length 164.6
  Bottom Layer w7: UT61.4@820.13,888.37 867.63,888.37 881.63,874.37 926.63,874.37 936.13,883.87 UT40.43@975.03,883.87
N840655_11254: UT35.43 UT71.4 | length 169.8
  Bottom Layer w7: UT71.4@815.13,1708.37 870.63,1708.37 882.63,1696.37 927.63,1696.37 937.13,1705.87 UT35.43@976.03,1705.87
N840669: UT50.41 UT69.5 | length 167.1
  Bottom Layer w7: UT69.5@815.13,2098.37 869.63,2098.37 876.63,2091.37 911.63,2091.37 919.53,2083.47 UT50.41@976.03,2083.47
N840669_9375: UT60.41 UT67.5 | length 167.1
  Bottom Layer w7: UT67.5@815.13,3333.37 859.63,3333.37 864.63,3328.37 913.63,3328.37 923.53,3318.47 UT60.41@976.03,3318.47
N840669_10481: UT45.41 UT65.5 | length 168.1
  Bottom Layer w7: UT65.5@815.13,2920.37 862.63,2920.37 867.63,2915.37 925.63,2915.37 935.53,2905.47 UT45.41@977.03,2905.47
N840669_10677: UT55.41 UT63.5 | length 167.7
  Bottom Layer w7: UT63.5@815.13,1278.37 869.63,1278.37 873.63,1274.37 917.63,1274.37 927.53,1264.47 UT55.41@977.03,1264.47
N840669_10873: UT40.41 UT61.5 | length 161.5
  Bottom Layer w7: UT61.5@820.13,868.37 865.63,868.37 873.63,860.37 905.63,860.37 913.53,852.47 UT40.41@975.03,852.47
N840669_11265: UT35.41 UT71.5 | length 166.7
  Bottom Layer w7: UT71.5@815.13,1688.37 869.63,1688.37 875.63,1682.37 914.63,1682.37 922.53,1674.47 UT35.41@976.03,1674.47
N840719: UT60.40 UT67.6 | length 165.3
  Bottom Layer w7: UT67.6@815.13,3313.37 903.63,3313.37 914.23,3302.77 UT60.40@976.03,3302.77
N840719_18000: UT55.40 UT63.6 | length 165.9
  Bottom Layer w7: UT63.6@815.13,1258.37 904.63,1258.37 914.23,1248.77 UT55.40@977.03,1248.77
N840719_18001: UT50.40 UT69.6 | length 165.3
  Bottom Layer w7: UT69.6@815.13,2078.37 862.63,2078.37 863.63,2077.37 900.63,2077.37 910.23,2067.77 UT50.40@976.03,2067.77
N840719_18002: UT45.40 UT65.6 | length 167.1
  Bottom Layer w7: UT65.6@815.13,2900.37 860.63,2900.37 861.63,2901.37 912.63,2901.37 924.23,2889.77 UT45.40@977.03,2889.77
N840719_18003: UT40.40 UT61.6 | length 159.7
  Bottom Layer w7: UT61.6@820.13,848.37 865.63,848.37 867.63,846.37 895.43,846.37 905.03,836.77 UT40.40@975.03,836.77
N840719_18004: UT35.40 UT71.6 | length 164.9
  Bottom Layer w7: UT71.6@815.13,1668.37 908.63,1668.37 918.23,1658.77 UT35.40@976.03,1658.77
N840735: UT50.38 UT69.7 | length 177.9
  Bottom Layer w7: UT69.7@815.13,2059.37 843.63,2059.37 875.63,2027.37 895.63,2027.37 904.63,2036.37 UT50.38@976.03,2036.37
N840735_9360: UT60.38 UT67.7 | length 178.7
  Bottom Layer w7: UT67.7@815.13,3294.37 841.63,3294.37 874.63,3261.37 894.63,3261.37 904.63,3271.37 UT60.38@976.03,3271.37
N840735_10468: UT45.38 UT65.7 | length 178.9
  Bottom Layer w7: UT65.7@815.13,2881.37 844.63,2881.37 876.63,2849.37 896.63,2849.37 905.63,2858.37 UT45.38@977.03,2858.37
N840735_10664: UT55.38 UT63.7 | length 178.5
  Bottom Layer w7: UT63.7@815.13,1239.37 845.63,1239.37 876.63,1208.37 896.63,1208.37 905.63,1217.37 UT55.38@977.03,1217.37
N840735_10860: UT40.38 UT61.7 | length 172.3
  Bottom Layer w7: UT61.7@820.13,829.37 841.63,829.37 874.63,796.37 894.63,796.37 903.63,805.37 UT40.38@975.03,805.37
N840735_11252: UT35.38 UT71.7 | length 177.5
  Bottom Layer w7: UT71.7@815.13,1649.37 844.63,1649.37 875.63,1618.37 895.63,1618.37 904.63,1627.37 UT35.38@976.03,1627.37
N840763: UT50.37 UT69.8 | length 174.3
  Bottom Layer w7: UT69.8@815.13,2036.37 846.63,2036.37 870.63,2012.37 900.63,2012.37 908.93,2020.67 UT50.37@976.03,2020.67
N840763_9393: UT60.37 UT67.8 | length 174.3
  Bottom Layer w7: UT67.8@815.13,3271.37 844.63,3271.37 868.63,3247.37 900.63,3247.37 908.93,3255.67 UT60.37@976.03,3255.67
N840763_10464: UT45.37 UT65.8 | length 174.5
  Bottom Layer w7: UT65.8@815.13,2858.37 842.63,2858.37 865.63,2835.37 902.63,2835.37 909.93,2842.67 UT45.37@977.03,2842.67
N840763_10660: UT55.37 UT63.8 | length 174
  Bottom Layer w7: UT63.8@815.13,1216.37 847.63,1216.37 869.63,1194.37 902.63,1194.37 909.93,1201.67 UT55.37@977.03,1201.67
N840763_10856: UT40.37 UT61.8 | length 167.9
  Bottom Layer w7: UT61.8@820.13,806.37 843.63,806.37 867.63,782.37 900.63,782.37 907.93,789.67 UT40.37@975.03,789.67
N840763_11248: UT35.37 UT71.8 | length 173
  Bottom Layer w7: UT71.8@815.13,1626.37 844.63,1626.37 866.63,1604.37 901.63,1604.37 908.93,1611.67 UT35.37@976.03,1611.67
N840791: UT50.36 UT70.1 | length 169
  Bottom Layer w7: UT70.1@815.13,1985.37 852.63,1985.37 865.63,1998.37 906.63,1998.37 913.23,2004.97 UT50.36@976.03,2004.97
N840791_9372: UT60.36 UT68.1 | length 169
  Bottom Layer w7: UT68.1@815.13,3220.37 843.63,3220.37 856.63,3233.37 908.63,3233.37 915.23,3239.97 UT60.36@976.03,3239.97
N840791_10479: UT45.36 UT66.1 | length 168.8
  Bottom Layer w7: UT66.1@815.13,2810.37 842.63,2810.37 852.63,2820.37 910.63,2820.37 917.23,2826.97 UT45.36@977.03,2826.97
N840791_10675: UT55.36 UT64.1 | length 170.4
  Bottom Layer w7: UT64.1@815.13,1165.37 852.63,1165.37 867.63,1180.37 908.63,1180.37 914.23,1185.97 UT55.36@977.03,1185.97
N840791_10871: UT40.36 UT62.1 | length 162.6
  Bottom Layer w7: UT62.1@820.13,755.37 848.63,755.37 861.63,768.37 906.63,768.37 912.23,773.97 UT40.36@975.03,773.97
N840791_11263: UT35.36 UT72.1 | length 169.4
  Bottom Layer w7: UT72.1@815.13,1575.37 852.63,1575.37 867.63,1590.37 908.63,1590.37 914.23,1595.97 UT35.36@976.03,1595.97
N840803: UT50.35 UT70.2 | length 172
  Bottom Layer w7: UT70.2@815.13,1962.37 858.63,1962.37 880.63,1984.37 914.63,1984.37 919.53,1989.27 UT50.35@976.03,1989.27
N840803_9370: UT60.35 UT68.2 | length 172
  Bottom Layer w7: UT68.2@815.13,3197.37 849.63,3197.37 871.63,3219.37 915.63,3219.37 920.53,3224.27 UT60.35@976.03,3224.27
N840803_10463: UT45.35 UT66.2 | length 171.8
  Bottom Layer w7: UT66.2@815.13,2787.37 848.63,2787.37 867.63,2806.37 916.63,2806.37 921.53,2811.27 UT45.35@977.03,2811.27
N840803_10659: UT55.35 UT64.2 | length 173.5
  Bottom Layer w7: UT64.2@815.13,1142.37 858.63,1142.37 881.63,1165.37 916.63,1165.37 921.53,1170.27 UT55.35@977.03,1170.27
N840803_10855: UT40.35 UT62.2 | length 165.6
  Bottom Layer w7: UT62.2@820.13,732.37 854.63,732.37 876.63,754.37 912.63,754.37 916.53,758.27 UT40.35@975.03,758.27
N840803_11247: UT35.35 UT72.2 | length 172.5
  Bottom Layer w7: UT72.2@815.13,1552.37 858.63,1552.37 882.63,1576.37 916.63,1576.37 920.53,1580.27 UT35.35@976.03,1580.27
N840819: UT50.33 UT70.3 | length 174.4
  Bottom Layer w7: UT70.3@815.13,1942.37 824.13,1942.37 876.63,1943.37 885.63,1934.37 905.63,1934.37 929.13,1957.87 UT50.33@976.03,1957.87
N840819_9349: UT60.33 UT68.3 | length 174.4
  Bottom Layer w7: UT68.3@815.13,3177.37 876.63,3178.37 885.63,3169.37 905.63,3169.37 929.13,3192.87 UT60.33@976.03,3192.87
N840819_10472: UT45.33 UT66.3 | length 176.2
  Bottom Layer w7: UT66.3@815.13,2767.37 869.63,2767.37 880.63,2756.37 906.63,2756.37 930.13,2779.87 UT45.33@977.03,2779.87
N840819_10668: UT55.33 UT64.3 | length 175.4
  Bottom Layer w7: UT64.3@815.13,1122.37 824.13,1122.37 877.63,1124.37 886.63,1115.37 906.63,1115.37 930.13,1138.87 UT55.33@977.03,1138.87
N840819_10864: UT40.33 UT62.3 | length 168.4
  Bottom Layer w7: UT62.3@820.13,712.37 875.63,712.37 884.63,703.37 904.63,703.37 928.13,726.87 UT40.33@975.03,726.87
N840819_11256: UT35.33 UT72.3 | length 173.5
  Bottom Layer w7: UT72.3@815.13,1532.37 878.63,1532.37 885.63,1525.37 905.63,1525.37 929.13,1548.87 UT35.33@976.03,1548.87
N840847: UT50.32 UT70.4 | length 171.2
  Bottom Layer w7: UT70.4@815.13,1923.37 876.63,1923.37 879.63,1920.37 911.63,1920.37 933.43,1942.17 UT50.32@976.03,1942.17
N840847_9342: UT60.32 UT68.4 | length 172
  Bottom Layer w7: UT68.4@815.13,3158.37 869.63,3158.37 873.63,3154.37 910.63,3154.37 933.43,3177.17 UT60.32@976.03,3177.17
N840847_10480: UT45.32 UT66.4 | length 173.4
  Bottom Layer w7: UT66.4@815.13,2748.37 860.63,2748.37 866.63,2742.37 912.63,2742.37 934.43,2764.17 UT45.32@977.03,2764.17
N840847_10676: UT55.32 UT64.4 | length 171.8
  Bottom Layer w7: UT64.4@815.13,1103.37 878.63,1103.37 880.63,1101.37 912.63,1101.37 934.43,1123.17 UT55.32@977.03,1123.17
N840847_10872: UT40.32 UT62.4 | length 165.6
  Bottom Layer w7: UT62.4@820.13,693.37 874.63,693.37 878.63,689.37 910.63,689.37 932.43,711.17 UT40.32@975.03,711.17
N840847_11264: UT35.32 UT72.4 | length 170.8
  Bottom Layer w7: UT72.4@815.13,1513.37 876.63,1513.37 878.63,1511.37 911.63,1511.37 933.43,1533.17 UT35.32@976.03,1533.17
N840871: UT50.30 UT70.5 | length 164
  Bottom Layer w7: UT70.5@815.13,1903.37 914.63,1903.37 922.03,1910.77 UT50.30@976.03,1910.77
N840871_9343: UT60.30 UT68.5 | length 164
  Bottom Layer w7: UT68.5@815.13,3138.37 914.63,3138.37 922.03,3145.77 UT60.30@976.03,3145.77
N840871_10471: UT45.30 UT66.5 | length 163.7
  Bottom Layer w7: UT66.5@815.13,2728.37 918.63,2728.37 923.03,2732.77 UT45.30@977.03,2732.77
N840871_10667: UT55.30 UT64.5 | length 165.4
  Bottom Layer w7: UT64.5@815.13,1083.37 914.63,1083.37 923.03,1091.77 UT55.30@977.03,1091.77
N840871_10863: UT40.30 UT62.5 | length 157.6
  Bottom Layer w7: UT62.5@820.13,673.37 914.63,673.37 921.03,679.77 UT40.30@975.03,679.77
N840871_11255: UT35.30 UT72.5 | length 164.4
  Bottom Layer w7: UT72.5@815.13,1493.37 913.63,1493.37 922.03,1501.77 UT35.30@976.03,1501.77

## Text inside footprints (layer, text, board x,y; h text height)
J4: Top Overlay "SKT" at 4677.63,1702.7 h37.5 r270; Top Overlay "1" at 4482.75,1419.53 h37.5 r270; Bottom Overlay "9" at 4714.13,1299.42 h37.5 r90; Bottom Overlay "8" at 4469.12,504.42 h37.5 r270; Bottom Overlay "15" at 4654.13,598.32 h37.5 r270